# Altium PCB Dual H.PcbDoc
Units mil, origin at the board's own origin, x right, y up, seen from the top; angles counter-clockwise.
Board outline 1932.5 x 3050 mil, 2 copper layers (Top Layer, Bottom Layer); 23 components, 13 nets, 59 pads, 0 vias.
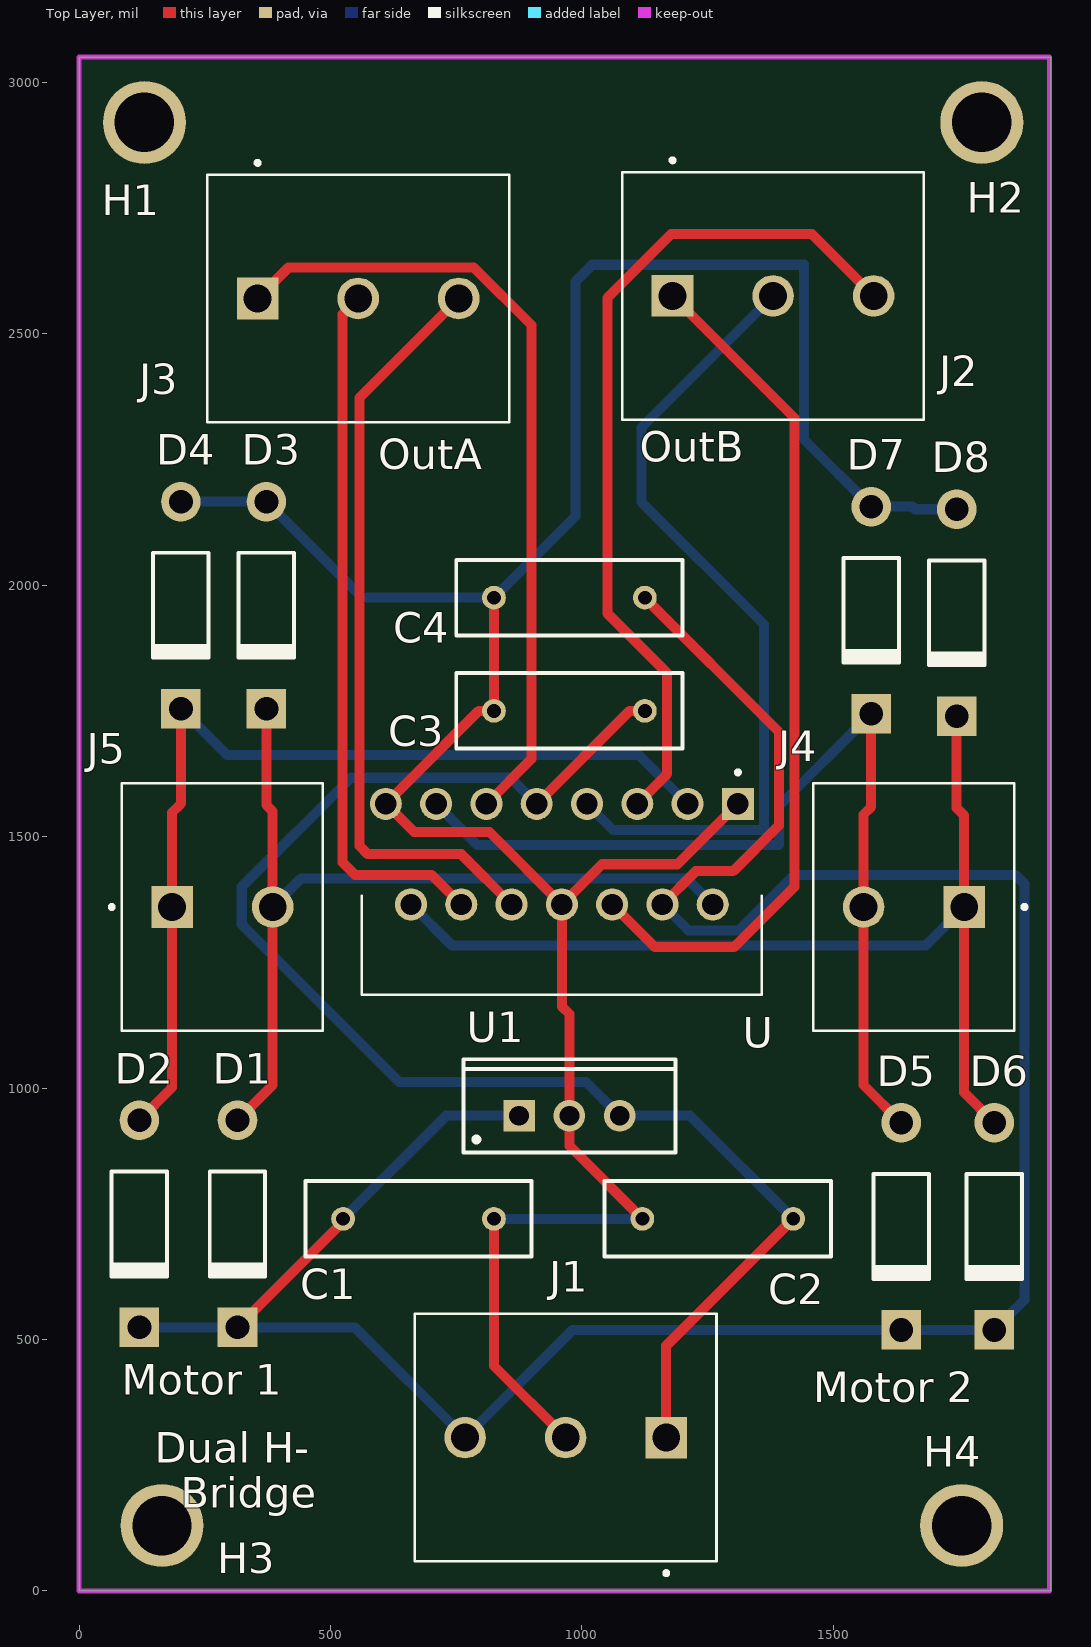
[diagram p0: Top Layer view]
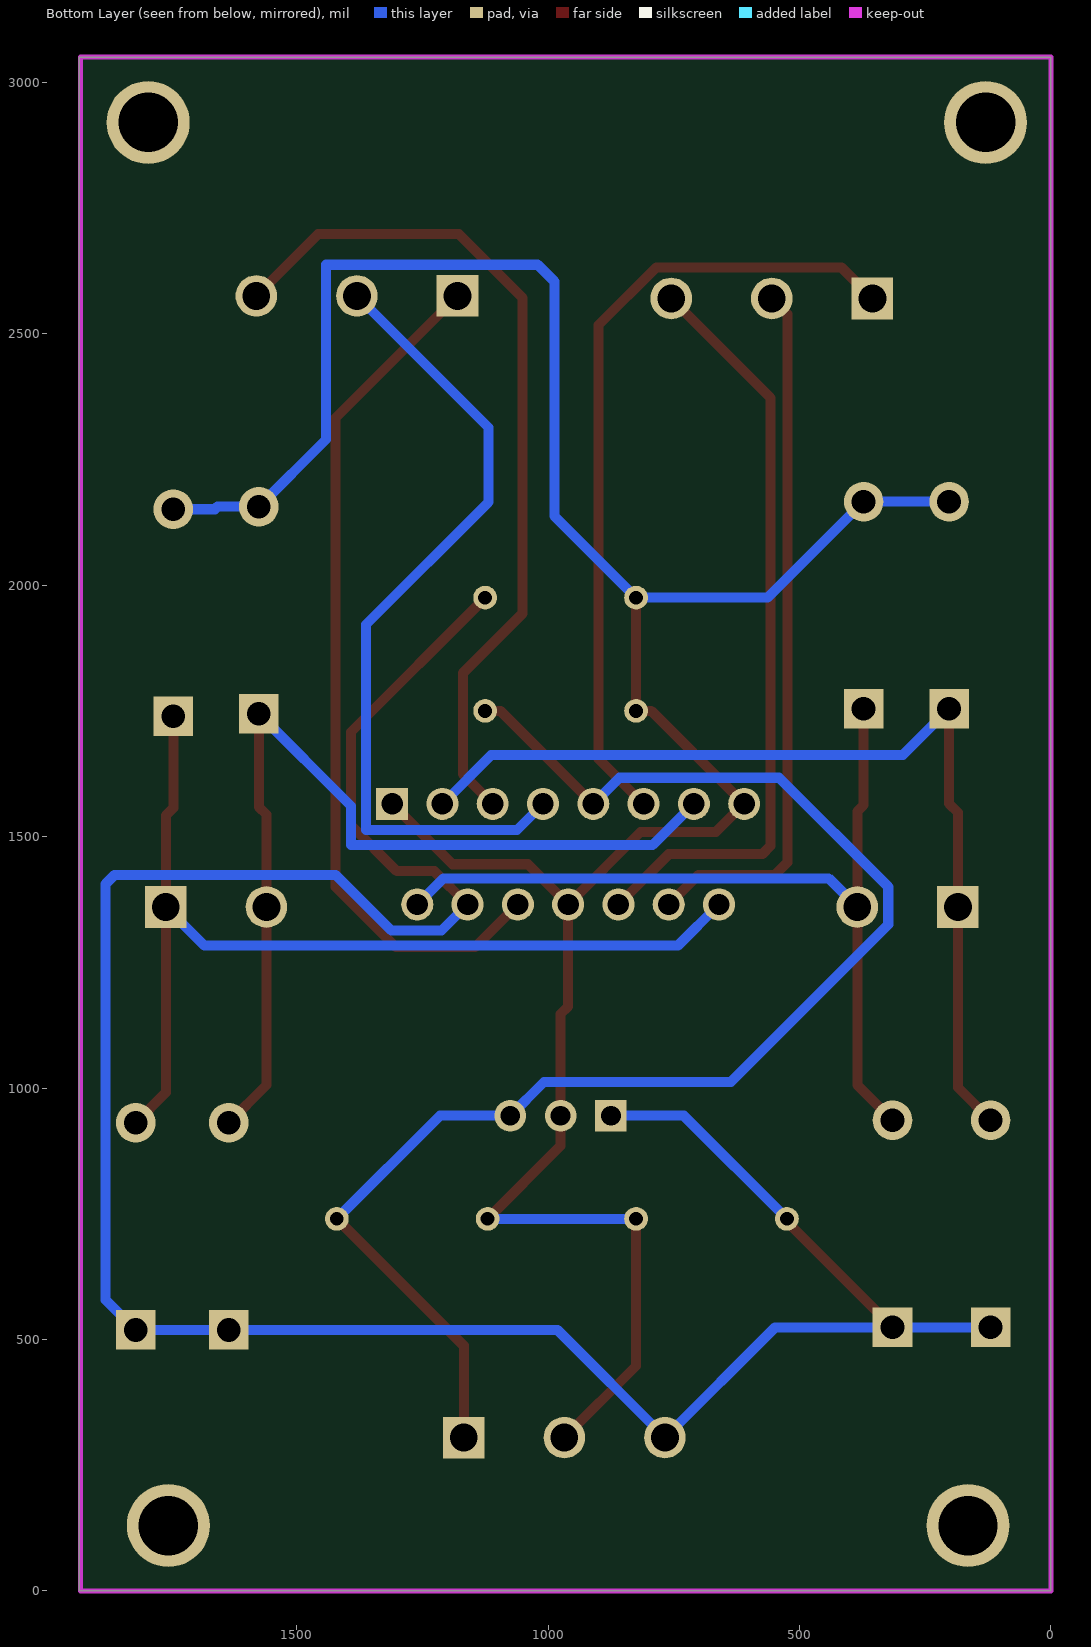
[diagram p1: Bottom Layer view, seen from below]

## Layer stack, top to bottom
Top Solder: solder mask 0.4, Solder Resist, Dk 3.5
Top Layer: signal copper 1.4
Dielectric 1: dielectric 12.6, FR-4, Dk 4.8
Bottom Layer: signal copper 1.4
Bottom Solder: solder mask 0.4, Solder Resist, Dk 3.5

## Board outline
0,0 0,3050 1932.5,3050 1932.5,0

## Design rules (kind name [scope] priority, off if disabled: settings)
Clearance [All] p1: gap=10 ignorepadtopadclearanceinfootprint=FALSE except(0: Arc-Hole Track-Hole SMDPad-Hole THPad-Hole Via-Hole Fill-Hole Poly-Hole Region-Hole Text-Hole)
PolygonConnect [All] p1: connectstyle=Relief reliefconductorwidth=10 reliefentries=4 polygonreliefangle="90 Angle" airgapwidth=10
RoutingVias [All] p1: holewidth=28 width=50 viastyle="Through Hole" minholewidth=28 minwidth=50 maxholewidth=28 maxwidth=50
SolderMaskExpansion [All] p1: expansion=4 istentingtop=FALSE
Width [All] p1: maxlimit=20 minlimit=20 preferedwidth=20 minimp=50.000000 maximp=50.000000 favimp=50.000000
30 further rules are at their usual default settings.

## Components (designator, comment, footprint, x,y, rotation, side; value= is the part's Value field where it differs from the comment)
C1 "Cap" RAD-0.3 675,740 r0 top value=47uF
C2 "Cap" RAD-0.3 1270,740 r0 top value=47uF
C3 "Cap" RAD-0.3 975,1750 r180 top value=100nF
C4 "Cap" RAD-0.3 975,1975 r0 top value=100nF
D1 "Diode 1N4007" DO-41 315,730 r270 top
D2 "Diode 1N4007" DO-41 120,730 r270 top
D3 "Diode 1N4007" DO-41 372.5,1960 r270 top
D4 "Diode 1N4007" DO-41 202.5,1960 r270 top
D5 "Diode 1N4007" DO-41 1635,725 r270 top
D6 "Diode 1N4007" DO-41 1820,725 r270 top
D7 "Diode 1N4007" DO-41 1575,1950 r270 top
D8 "Diode 1N4007" DO-41 1745,1945 r270 top
H1 "Hole 3mm" "Hole 3mm" 130,2920 r0 top
H2 "Hole 3mm" "Hole 3mm" 1795,2920 r0 top
H3 "Hole 3mm" "Hole 3mm" 165,130 r0 top
H4 "Hole 3mm" "Hole 3mm" 1755,130 r0 top
J1 "282847-3" TE_282847-3 967.5,305 r180 top
J2 "282847-3" TE_282847-3 1380,2575 r0 top
J3 "282847-3" TE_282847-3 555,2570 r0 top
J4 "282847-2" TE_282847-2 1760,1360 r180 top
J5 "282847-2" TE_282847-2 185,1360 r0 top
U "L298N" TO127P2020X500X2100-15 1310,1565 r270 top
U1 "LM2940CT-5.0" T03B 975,945 r0 top

## Footprints (in the part's own frame and the unit in brackets; to place one, negate y for a bottom-side part, rotate by r counter-clockwise, add the part's x,y. Pads: shape width x height; smd on the part's side, far side on the other; paste and mask are expansions set on the pad)
DO-41 [mm] "Diode, Axial; Body 5.2 x 2.7 mm (LxDia. max), Lead Dia. 0.86 mm (max)"
  round 2 hole 1.2: 1(-5.23,0)
  rect 2x2 hole 1.2: 2(5.23,0)
  silkscreen extent -2.65,-1.4 2.75,1.4
"Hole 3mm" [mil]
  round 165 hole 118.11: 1(0,0)
RAD-0.3 [mm] "Radial Cap, Thru-Hole; 2 Leads; 0.3 in Pin Spacing"
  round 1.2 hole 0.7: 1(-3.81,0) 2(3.81,0)
  silkscreen extent -5.72,-1.91 5.71,1.9
T03B [mm]
  rect 1.6x1.6 hole 1: 1(-2.54,0)
  round 1.6 hole 1: 2(0,0) 3(2.54,0)
  silkscreen extent -5.35,-1.85 5.35,2.85, body extent -5.4,-1.9 5.4,2.9, height 19.4
TE_282847-2 [mm]
  rect 2.1x2.1 hole 1.4: 1(0,0)
  round 2.1 hole 1.4: 2(5.08,0)
  silkscreen extent -3.15,-6.25 7.62,6.25
TE_282847-3 [mm]
  rect 2.1x2.1 hole 1.4: 1(-5.08,0)
  round 2.1 hole 1.4: 2(0,0) 3(5.08,0)
  silkscreen extent -7.62,-6.25 7.62,6.95
TO127P2020X500X2100-15 [mm]
  rect 1.62x1.62 hole 1.08: 1(0,0)
  round 1.62 hole 1.08: 2(5.08,-1.27) 3(0,-2.54) 4(5.08,-3.81) 5(0,-5.08) 6(5.08,-6.35) 7(0,-7.62) 8(5.08,-8.89) 9(0,-10.16) 10(5.08,-11.43) 11(0,-12.7) 12(5.08,-13.97) 13(0,-15.24) 14(5.08,-16.51) 15(0,-17.78)
  silkscreen extent -1.69,-18.99 9.63,1.21

## Part data
C1 C2 C3 C4: "Capacitor", LatestRevisionDate=17-Jul-2002, LatestRevisionNote="Re-released for DXP Platform.", PackageDescription="Radial Cap, Thru-Hole; 2 Leads; 0.3 in Pin Spacing", PackageReference=RAD-0.3, Published=8-Jun-2000, Publisher="Altium Limited"
D1 D2 D3 D4 D5 D6 D7 D8: "1 Amp General Purpose Rectifier", Code_JEDEC=DO-204-AL, ComponentLink1Description="Manufacturer Link", ComponentLink1URL=http://www.fairchildsemi.com/, ComponentLink2Description=Datasheet, ComponentLink2URL=http://www.fairchildsemi.com/ds/1N%2F1N4001.pdf, DatasheetVersion=1998, LatestRevisionDate=17-Jul-2002, LatestRevisionNote="Re-released for DXP Platform.", PackageDescription="Diode, Axial; Body 5.2 x 2.7 mm (LxDia. max), Lead Dia. 0.86 mm (max)", PackageReference=DO-41, PackageVersion=Aug-1999, Published=8-Jun-2000, Publisher="Altium Limited"
J1 J2 J3: "Conn Eurostyle Block 3 POS 5.08mm Solder Thru-Hole 17.5A/Contact Automotive Carton", Package=None, Arrow_Electronics-Purchase-URL=https://snapeda.com/shop?store=Arrow+Electronics&id=558977, Availability=Good, Centerline_Pitch="5.08 mm[.2 in]", DigiKey-Purchase-URL=https://snapeda.com/shop?store=DigiKey&id=558977, EU_RoHS_Compliance="Compliant with Exemptions", MF="TE Connectivity", Mouser-Purchase-URL=https://snapeda.com/shop?store=Mouser&id=558977, MP=282847-3, Number_of_Positions=3, Price=None, SnapEDA_Link=https://www.snapeda.com/parts/282847-3/TE%20Connectivity%20AMP%20Connectors/view-part/558977/?ref=snap
J4 J5: "Conn Terminal Block 2 POS 5.08mm Solder ST Thru-Hole 17.5A/Contact", Package=None, Availability=Unavailable, Centerline_Pitch="5.08 mm[.2 in]", EU_RoHS_Compliance="Compliant with Exemptions", MF="TE Connectivity", MP=282847-2, Number_of_Positions=2, Price=None, SnapEDA_Link=https://www.snapeda.com/parts/282847-2/TE%20Connectivity%20AMP%20Connectors/view-part/478150/?ref=snap, TE_purchase_URL=https://www.te.com/usa-en/product-282847-2.html?te_bu=Cor&te_type=disp&te_campaign=seda_glo_cor-seda-global-disp-prtnr-fy19-seda-model-bom-cta_sma-317_1&elqCampaignId=32493
U: "Half Bridge _4_ Driver DC Motors, Relays, Solenoids, Stepper Motors Bipolar 15-Multiwatt", Package="Multiwatt-15 STMicroelectronics", Availability=Unavailable, MF=STMicroelectronics, MP=L298N, Price=None, SnapEDA_Link=https://www.snapeda.com/parts/L298N/STMicroelectronics/view-part/294022/?ref=snap
U1: library part LM2940CT-5.0_1, "1A Low Dropout Regulator, 3-pin TO-220", Manufacturer="National Semiconductor", PackageTopMarking="NSUZXYTTE#*LM2940CT*-5.0 P+", PowerWise=N, ComponentLink1Description="Manufacturer URL", ComponentLink1URL=http://www.national.com/, ComponentLink2Description="LM2940C Datasheet", ComponentLink2URL=http://www.national.com/ds/LM/LM2940C.pdf, ComponentLink3Description="LM2940C Web Page", ComponentLink3URL=http://www.national.com/pf/LM/LM2940C.html, ComponentLink4Description="T03B Package Page", ComponentLink4URL=http://www.national.com/packaging/folders/t03b.html, CompType="LDO IC", DatasheetVersion=Jan-2007, High-Reliability=Y, PackageDescription="TO-220, Molded, 3 Lead, Straight", PackageReference=T03B, PackageVersion="revL, Jan-1992", PartNumber=LM2940CT-5.0, PinCount=3, RoHS=N

## Nets (pads, with @x,y where several pads share a name; then routed paths per layer and width w, separated by ;. In a path a pad name is that pad's centre, name@x,y a point inside that pad or via, vN(x,y) a via of type N, cw(c..) or ccw(c..) an arc to the next point about the centre after c; other vN are vias at no path point)
+5: C2.2 C3.1 J1.1 U1.3 U.9 | length 2943
  Top Layer w20: U.9 1095,1750 C3.1 ; J1.1 1167.5,487.5 C2.2
  Bottom Layer w20: U.9 858,1617 540.5,1617 323.5,1400 323.5,1325 636.5,1012 1008,1012 U1.3 1215,945 C2.2
-5: C1.1 C4.2 D1.2 D2.2 D5.2 D6.2 J1.3 U1.1 U.4 | length 5183.3
  Top Layer w20: D1.2 525,734.09 C1.1 ; C4.2 1391.89,1708.11 1391.89,1522.5 1300.59,1431.2 1226.2,1431.2 U.4
  Bottom Layer w20: D2.2 D1.2 548.41,524.09 J1.3 981.59,519.09 D5.2 D6.2 1879.5,578.59 1879.5,1406 1861.5,1424 1422.39,1424 1311.5,1313.11 1211.89,1313.11 U.4 ; C1.1 730,945 U1.1
GND: C1.2 C2.1 C3.2 C4.1 D3.1 D4.1 D7.1 D8.1 J1.2 U1.2 U.1 U.8 U.15 | length 5471
  Top Layer w20: C1.2 825,447.5 J1.2 ; C4.1 C3.2 795,1750 U.15@627.5,1582.5 ; C2.1 975,885 U1.2 975,1147 960,1162 U.8 ; U.1 1190,1445 1040,1445 U.8 ; U.15@627.5,1548 627.5,1565 U.15@627.5,1582.5 ; U.15@627.5,1548 666.5,1509 816,1509 U.8 ; U.15@627.5,1548 U.15 U.15@627.5,1582.5
  Bottom Layer w20: D4.1 D3.1 563.41,1975 C4.1 987.5,2137.5 987.5,2604 1020.5,2637 1441.5,2637 1441.5,2289.41 D7.1 1657.5,2155.91 1662.5,2150.91 D8.1 ; C1.2 C2.1
NetD1_1: D1.1 D3.2 J5.2 U.2 | length 1772.5
  Top Layer w20: D1.1 385,1005.91 J5.2 385,1550 372.5,1562.5 D3.2
  Bottom Layer w20: J5.2 442,1417 1208,1417 U.2
NetD2_1: D2.1 D4.2 J5.1 U.3 | length 1938.2
  Top Layer w20: D2.1 185,1000.91 J5.1 185,1548 202.5,1565.5 D4.2
  Bottom Layer w20: D4.2 294.59,1662 1113,1662 U.3
NetD5_1: D5.1 D7.2 J4.2 U.13 | length 1903.1
  Top Layer w20: D7.2 1575,1559 1560,1544 J4.2 1560,1005.91 D5.1
  Bottom Layer w20: U.13 791.89,1483.11 1391.89,1483.11 1391.89,1560.98 D7.2
NetD6_1: D6.1 D8.2 J4.1 U.14 | length 2005
  Top Layer w20: D8.2 1745,1557 1760,1542 J4.1 1760,990.91 D6.1
  Bottom Layer w20: U.14 741.89,1283.11 1683.11,1283.11 J4.1
NetJ2_1: J2.1 U.6 | length 1722.9
  Top Layer w20: U.6 1145,1280 1302.5,1280 1422.5,1400 1422.5,2332.5 J2.1
NetJ2_2: J2.2 U.7 | length 1644.4
  Bottom Layer w20: U.7 1061.89,1513.11 1361.89,1513.11 1361.89,1921.61 1118.5,2165 1118.5,2313.5 J2.2
NetJ2_3: J2.3 U.5 | length 1713
  Top Layer w20: U.5 1169.5,1624.5 1169.5,1825 1050.5,1944 1050.5,2571 1177.5,2698 1457,2698 J2.3
NetJ3_1: J3.1 U.11 | length 1606.9
  Top Layer w20: J3.1 417,2632 784.5,2632 899.5,2517 899.5,1654.5 U.11
NetJ3_2: J3.2 U.12 | length 1405.1
  Top Layer w20: J3.2 523.75,2538.75 523.75,1448.74 548.49,1424 701,1424 U.12
NetJ3_3: J3.3 U.10 | length 1521.1
  Top Layer w20: J3.3 557.5,2372.5 557.5,1481.51 574.01,1465 760,1465 U.10
pads on no net: H1.1 H2.1 H3.1 H4.1

## Keep-outs
Keep-Out Layer:
  lines w10: 0,0 0,3050 1930,3050 1930,0 0,0

## Silkscreen, mask and mechanical layers (free items; w line width, h text height)
Top Overlay:
  text "OutB" at 1115,2245 h60
  text "OutA" at 595,2230 h60
  text "Motor 1" at 85,390 h60
  text "Motor 2" at 1460,375 h60
  text "Dual H- /   Bridge" at 150,165 h60